# Altium PCB IoTs_PCB.PcbDoc
Units mil, origin at the board's own origin, x right, y up, seen from the top; angles counter-clockwise.
Board outline 3940 x 3935 mil, 2 copper layers (Top Layer, Bottom Layer); 12 components, 13 nets, 57 pads, 0 vias.
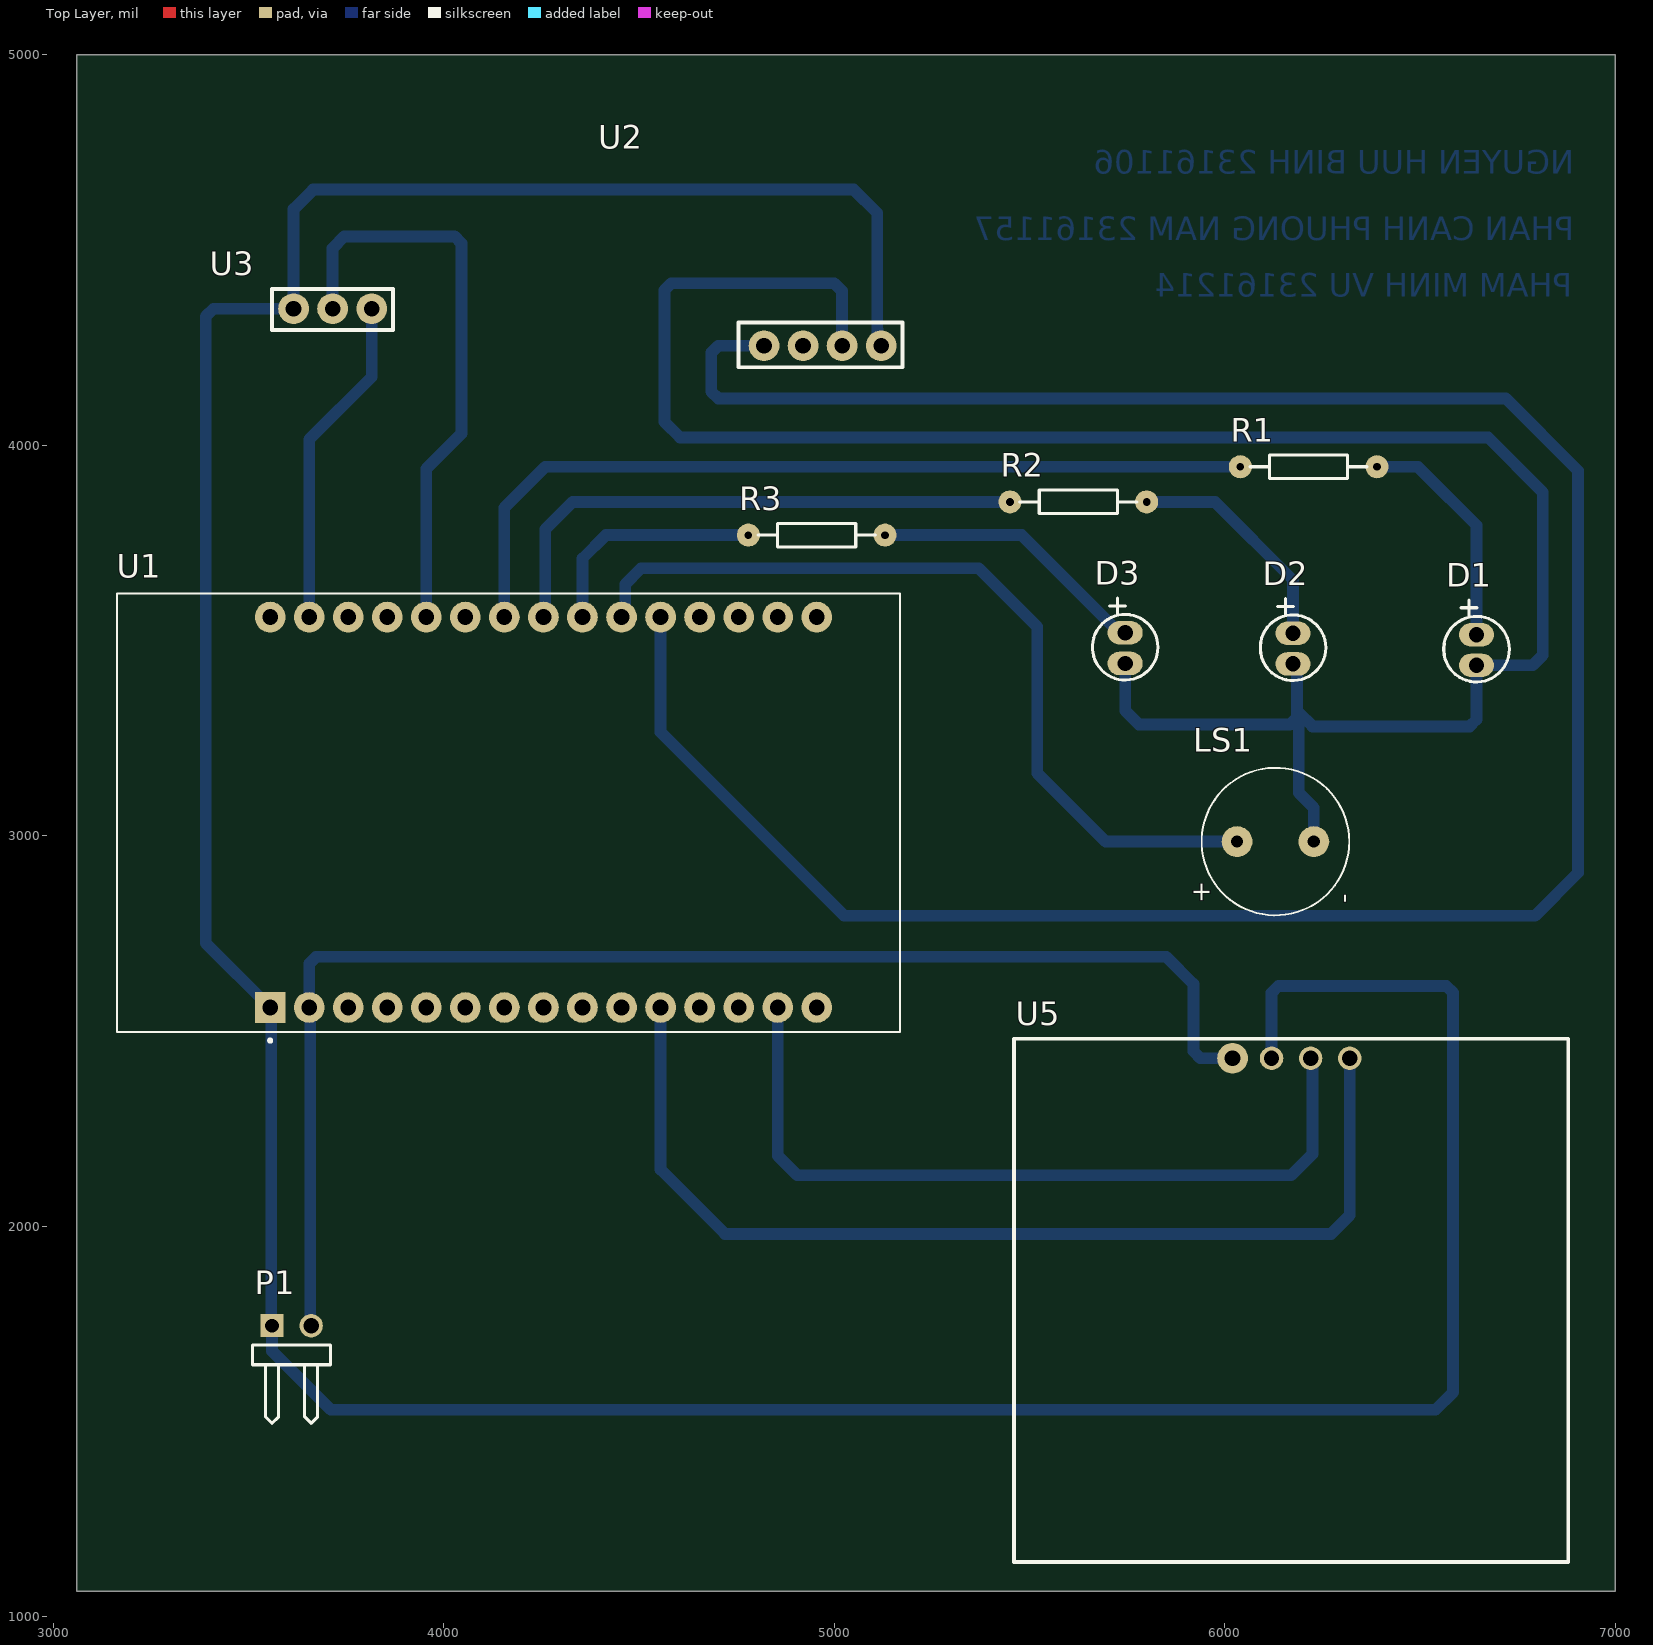
[diagram p0: Top Layer view]
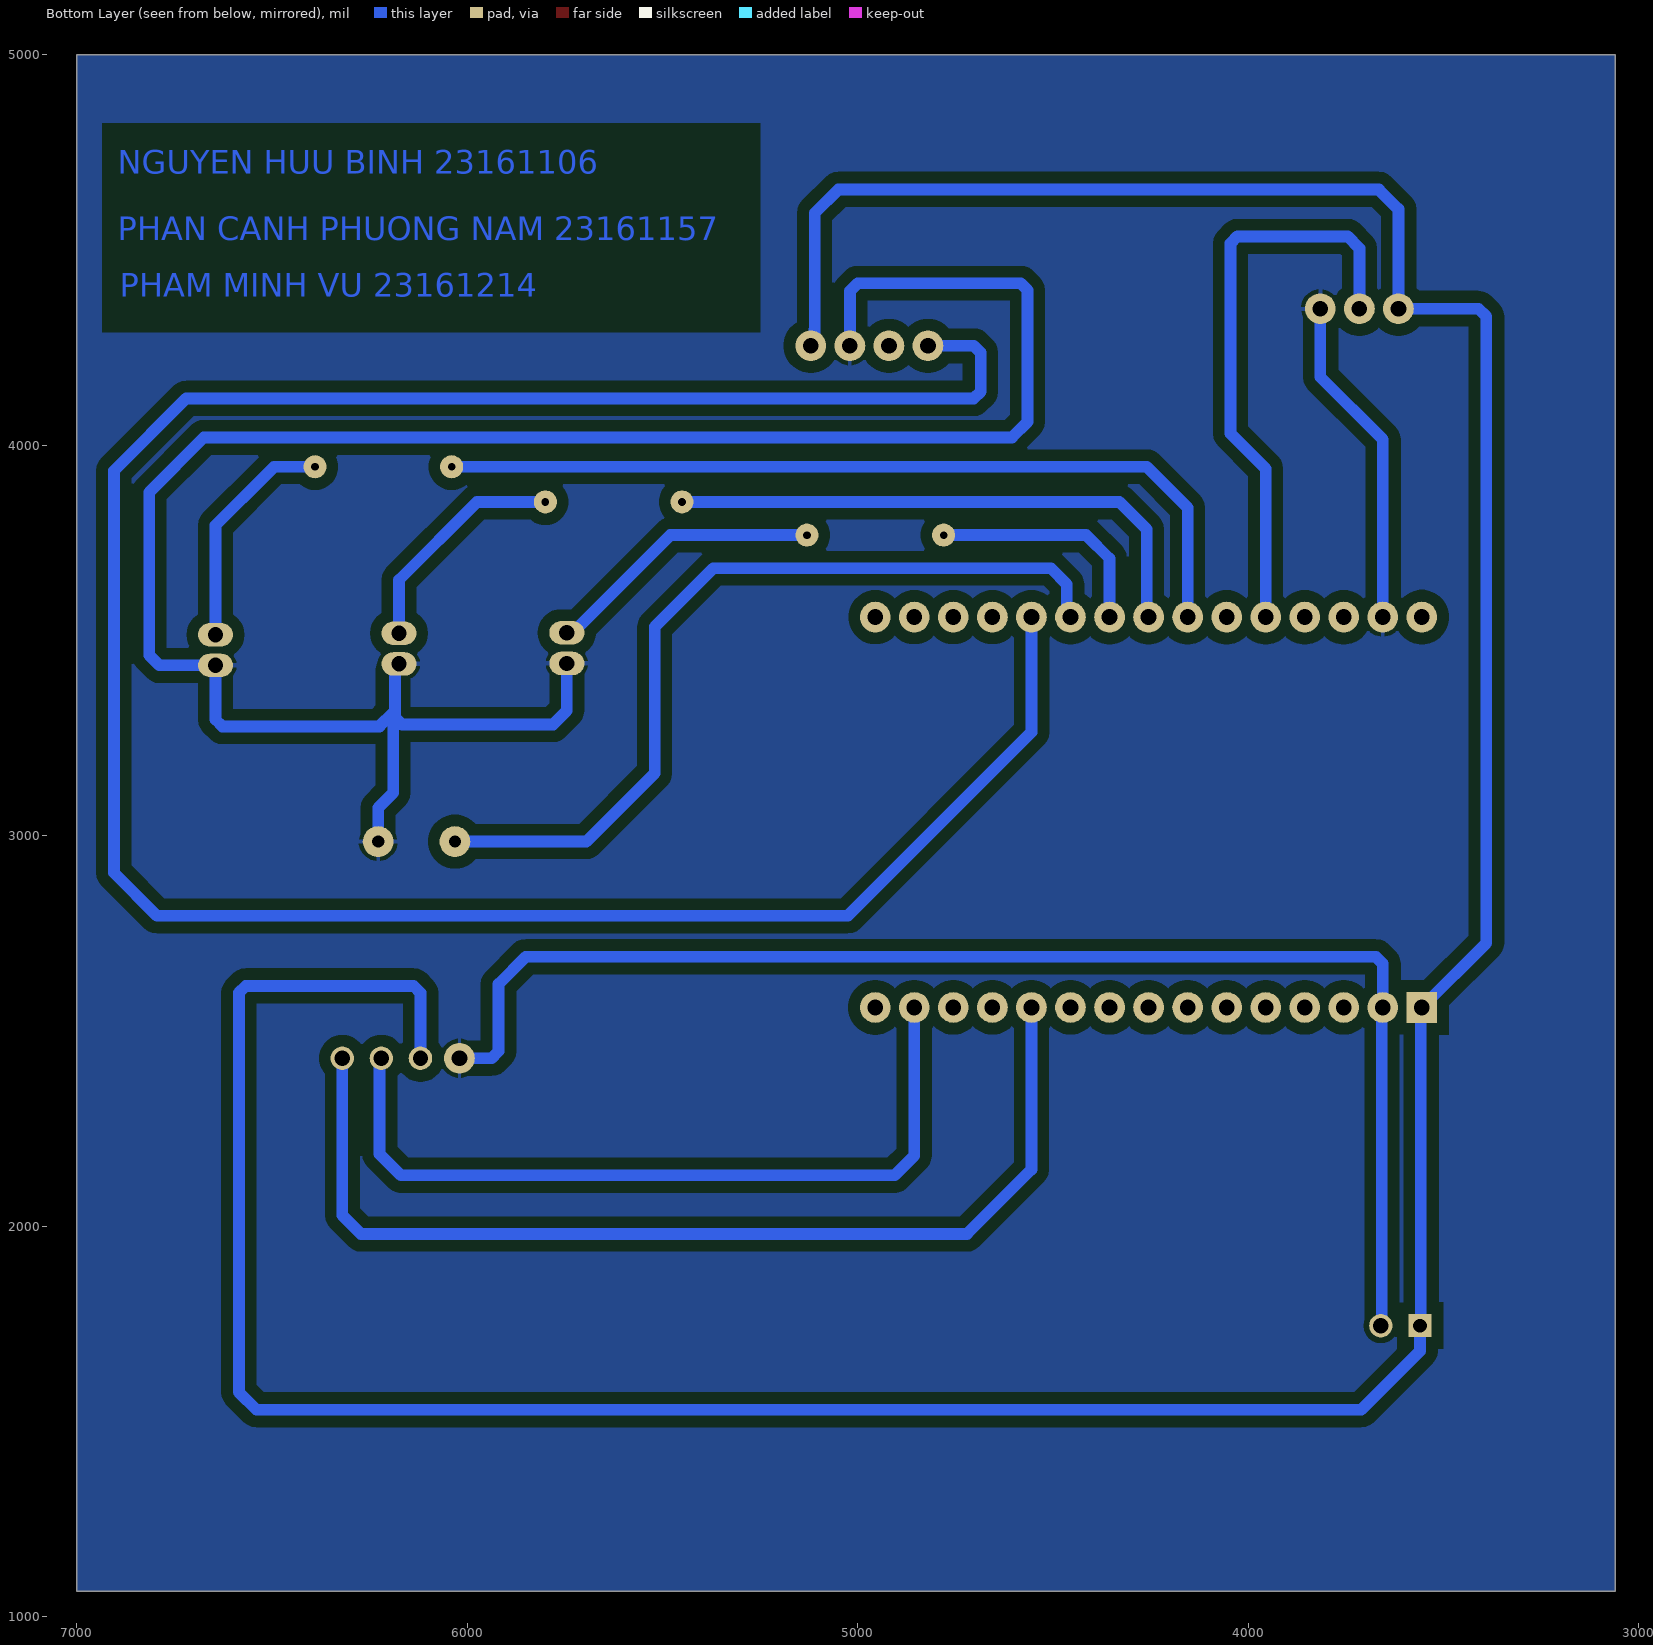
[diagram p1: Bottom Layer view, seen from below]

## Layer stack, top to bottom
Top Solder: solder mask 0.4, Solder Resist, Dk 3.5
Top Layer: signal copper 1.4
Dielectric 1: dielectric 12.6, FR-4, Dk 4.8
Bottom Layer: signal copper 1.4
Bottom Solder: solder mask 0.4, Solder Resist, Dk 3.5

## Board outline
3060,1065 7000,1065 7000,5000 3060,5000

## Design rules (kind name [scope] priority, off if disabled: settings)
Clearance [All] p1: gap=10 ignorepadtopadclearanceinfootprint=FALSE except(30: Arc-Fill Arc-Poly Arc-Region Track-Fill Track-Poly Track-Region SMDPad-Fill SMDPad-Poly SMDPad-Region THPad-Fill THPad-Poly THPad-Region Via-Fill Via-Poly Via-Region Fill-Fill Fill-Poly Fill-Region Poly-Poly Poly-Region Region-Region)
PolygonConnect [All] p1: connectstyle=Relief reliefconductorwidth=10 reliefentries=4 polygonreliefangle="90 Angle" airgapwidth=10
RoutingLayers [All] p1: top layer_v5=FALSE bottom layer_v5=TRUE
RoutingVias [All] p1: holewidth=28 width=50 viastyle="Through Hole" minholewidth=28 minwidth=50 maxholewidth=28 maxwidth=50
SolderMaskExpansion [All] p1: expansion=4 istentingtop=FALSE
Width [All] p1: maxlimit=50 minlimit=28 preferedwidth=30
29 further rules are at their usual default settings.

## Components (designator, comment, footprint, x,y, rotation, side; value= is the part's Value field where it differs from the comment)
D1 "LED" CAP10UF 6645,3436.26 r90 top
D2 "LED" CAP10UF 6175,3440 r90 top
D3 "LED" CAP10UF 5745,3441.26 r90 top
LS1 "CMI-9605IC-0580T" CUI_CMI-9605IC-0580T 6130,2985 r90 top
P1 "Header 2H" HDR1X2H 3560,1745 r0 top
R1 "220" R1/6W 6215,3945 r0 top value="R1/4W - 1K"
R2 "220" R1/6W 5625,3855 r0 top value="R1/4W - 1K"
R3 "220" R1/6W 4955,3770 r0 top value="R1/4W - 1K"
U1 "ESP32_DEVKIT_V1" ESP32_DEVKIT_V1 4190.83,3045 r90 top
U2 "MQ_135" MQ_135 4820,4255 r0 top
U3 "DHT11" DHT11 3615,4350 r0 top
U5 "LCD OLED SSD1306" "LCD SH1106" 6235,1735 r0 top

## Footprints (in the part's own frame and the unit in brackets; to place one, negate y for a bottom-side part, rotate by r counter-clockwise, add the part's x,y. Pads: shape width x height; smd on the part's side, far side on the other; paste and mask are expansions set on the pad)
CAP10UF [mil]
  oval 60x90 hole 39.37 unplated: 1(78.74,0) 2(0,0)
  silkscreen extent -42,-84 167,84
CUI_CMI-9605IC-0580T [mm]
  round 2 hole 0.8: N(0,-2.5) P(0,2.5)
  silkscreen extent -4.8,-4.8 4.8,4.8, body extent -4.8,-4.8 4.8,4.8
DHT11 [mm]
  round 2 hole 1.02: 1(0,0) 2(2.54,0) 3(5.08,0)
  silkscreen extent -1.4,-1.4 6.48,1.27, body extent -5.71,-7.49 10.29,1.01, height 24.09
ESP32_DEVKIT_V1 [mm]
  rect 2x2 / inner round 2 / far side rect 2x2 hole 1.02: 1(-12.319,16.15)
  round 2 hole 1.02: 2(-12.319,13.61) 3(-12.319,11.07) 4(-12.319,8.53) 5(-12.319,5.99) 6(-12.319,3.45) 7(-12.319,0.91) 8(-12.319,-1.63) 9(-12.319,-4.17) 10(-12.319,-6.71) 11(-12.319,-9.25) 12(-12.319,-11.79) 13(-12.319,-14.33) 14(-12.319,-16.87) 15(-12.319,-19.41) 16(13.081,-19.41) 17(13.081,-16.87) 18(13.081,-14.33) 19(13.081,-11.79) 20(13.081,-9.25) 21(13.081,-6.71) 22(13.081,-4.17) 23(13.081,-1.63) 24(13.081,0.91) 25(13.081,3.45) 26(13.081,5.99) 27(13.081,8.53) 28(13.081,11.07) 29(13.081,13.61) 30(13.081,16.15)
  silkscreen extent -14.57,-24.84 14.61,26.11
HDR1X2H [mm] "Connector; Header; 2 Position; Right Angle"
  rect 1.5x1.5 hole 0.9: 1(0,0)
  round 1.524 hole 1.02: 2(2.54,0)
  silkscreen extent -1.27,-6.35 3.81,-1.27, body extent -1.27,-7 3.81,1.27, height 4.33
"LCD SH1106" [mil]
  round 60 hole 39.37: 1(85,695) 2(-15,695) 3(-115,695)
  round 78.74 hole 40.16: 4(-215,695)
  silkscreen extent -775,-595 645,745, body extent -774,-594 644,744, height 378
MQ_135 [mm]
  round 2 hole 1.02: 1(7.62,0) 2(5.08,0) 3(2.54,0) 4(0,0)
  silkscreen extent -1.65,-1.4 9.02,1.52, body extent -6.75,-4.99 14.25,18.01, height 1.5
R1/6W [mm]
  round 1.5 hole 0.5: 1(-4.445,0) 2(4.445,0)
  silkscreen extent -3.81,-0.76 3.81,0.76

## Part data
LS1: "9.6 mm, 5 Vdc, 80 dB, Through Hole, Driving Circuit, Magnetic Audio Indicator Buzzer", Package=Package, Check_prices=https://www.snapeda.com/parts/CMI-9605IC-0580T/Same+Sky/view-part/?ref=eda, MF="Same Sky", MP=CMI-9605IC-0580T, SnapEDA_Link=https://www.snapeda.com/parts/CMI-9605IC-0580T/Same+Sky/view-part/?ref=snap
P1: "Header, 2-Pin, Right Angle", LatestRevisionDate=17-Jul-2002, LatestRevisionNote="Re-released for DXP Platform.", Publisher="Altium Limited"
R1 R2 R3: library part Res, "Resistor 1/4W"
U5: library part "LCD SH1106"

## Nets (pads, with @x,y where several pads share a name; then routed paths per layer and width w, separated by ;. In a path a pad name is that pad's centre, name@x,y a point inside that pad or via, vN(x,y) a via of type N, cw(c..) or ccw(c..) an arc to the next point about the centre after c; other vN are vias at no path point)
A0: U1.20 U2.4 | length 6461.3
  Bottom Layer w30: U1.20 4555,3265 5025,2795 6795,2795 6905,2905 6905,3935 6720,4120 4702.57,4120 4685,4137.57 4685,4237.43 4702.57,4255 U2.4
DAT: U1.26 U3.2 | length 1499.4
  Bottom Layer w30: U3.2 3715,4505 3745,4535 4027.43,4535 4045,4517.43 4045,4030 3955,3940 U1.26
GND: D1.2 D2.2 D3.2 LS1.N P1.2 U1.2 U1.29 U2.2 U3.3 U5.4 | length 9926
  Bottom Layer w30: U1.29 3655,4015 3815,4175 U3.3 ; P1.2 3657.5,1747.5 3657.5,2557.5 U1.2 3655,2672.43 3672.57,2690 5850,2690 5920,2620 5920,2447.57 5937.57,2430 U5.4 ; U2.2 5020,4395 5000,4415 4582.57,4415 4565,4397.43 4565,4060 4605,4020 6675,4020 6815,3880 6815,3462.57 6788.69,3436.26 D1.2 6645,3297.57 6627.43,3280 6225,3280 6190,3315 ; D3.2 5745,3320 5780,3285 6167.43,3285 6182.88,3300.45 ; D2.2 6185,3430 6185,3302.57 ; 6188,3310.03 6190,3315 ; LS1.N 6228.43,3071.57 6190,3110 6190,3300.45 6190,3315
GREEN: R3.1 U1.22 | length 599.9
  Bottom Layer w30: U1.22 4355,3710 4415,3770 R3.1
LS1: LS1.P U1.21 | length 2181.9
  Bottom Layer w30: U1.21 4464.33,3569.33 4464.33,3644.33 4505,3685 5370,3685 5384.99,3670.01 5520,3535 5520,3160 5695,2985 LS1.P
NetD1_1: D1.1 R1.2 | length 597.1
  Bottom Layer w30: R1.2 6495,3945 6509.99,3930.01 6645,3795 D1.1
NetD2_1: D2.1 R2.2 | length 594.1
  Bottom Layer w30: R2.2 5975,3855 6175,3655 D2.1
NetD3_1: D3.1 R3.2 | length 718.6
  Bottom Layer w30: R3.2 5480,3770 5730,3520 D3.1
RED: R1.1 U1.24 | length 2208.5
  Bottom Layer w30: U1.24 4155,3840 4260,3945 R1.1
SCL: U1.14 U5.2 | length 2040.6
  Bottom Layer w30: U1.14 4855,2180 4905,2130 6170,2130 6225,2185 6225,2425 U5.2
SDA: U1.11 U5.1 | length 2670.5
  Bottom Layer w30: U1.11 4555,2145 4720,1980 6272.43,1980 6320,2027.57 U5.1
VCC: P1.1 U1.1 U2.1 U3.1 U5.3 | length 9868.6
  Bottom Layer w30: U2.1 5110.67,4264.33 5110.67,4296.27 5110,4296.94 5110,4595 5050,4655 3665,4655 3615,4605 U3.1 3410,4350 3390,4330 3390,2725 U1.1 3557.5,2557.5 3557.5,1747.5 P1.1 3560,1680 3710,1530 6540,1530 6585,1575 6585,2597.43 6567.43,2615 6137.57,2615 6120,2597.43 U5.3
YELLOW: R2.1 U1.23 | length 1446.1
  Bottom Layer w30: U1.23 4260,3565 4260,3785 4330,3855 R2.1
pads on no net: U1.3 U1.4 U1.5 U1.6 U1.7 U1.8 U1.9 U1.10 U1.12 U1.13 U1.15 U1.16 U1.17 U1.18 U1.19 U1.25 U1.27 U1.28 U1.30 U2.3

## Polygon pours and split planes (outlines as drawn)
GND on Bottom Layer "GND_L02_P000" (solid, pour order 0): 3060,5000 7000,5000 7000,1065 3060,1065

## Other copper
Bottom Layer:
  pour cut-out: 5250,4825 6935,4825 6935,4290 5250,4290
  text "NGUYEN HUU BINH 23161106" at 6895,4695 h60
  text "PHAN CANH PHUONG NAM 23161157" at 6895,4525 h60
  text "PHAM MINH VU 23161214" at 6890,4380 h60

## Text inside footprints (layer, text, board x,y; h text height)
LS1: Top Overlay "+" at 5961.89,2827.52 h50 r90; Top Overlay "-" at 6326.46,2827.52 h50 r90; Mechanical 13 "+" at 5961.89,2827.52 h50 r90; Mechanical 13 "-" at 6326.46,2827.52 h50 r90